# EAGLE board Escorna_Shield_botoneira_2_0B (EAGLE 6.4)
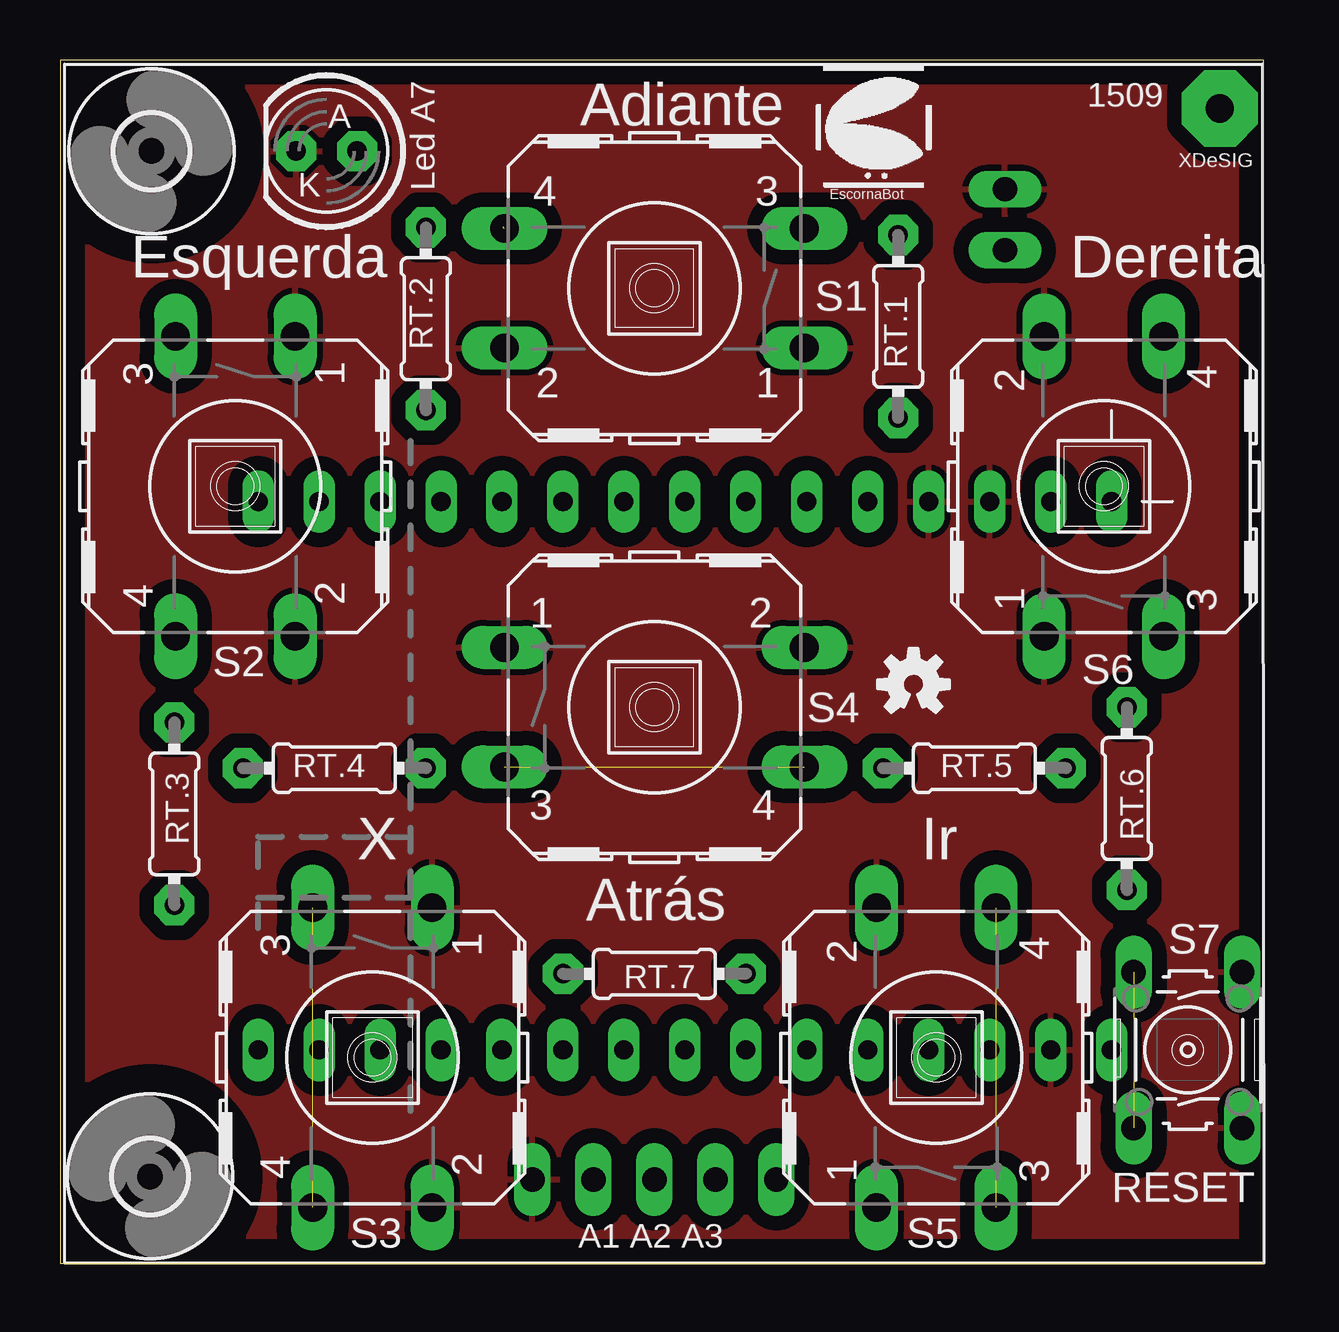
[diagram p0: board, top side]
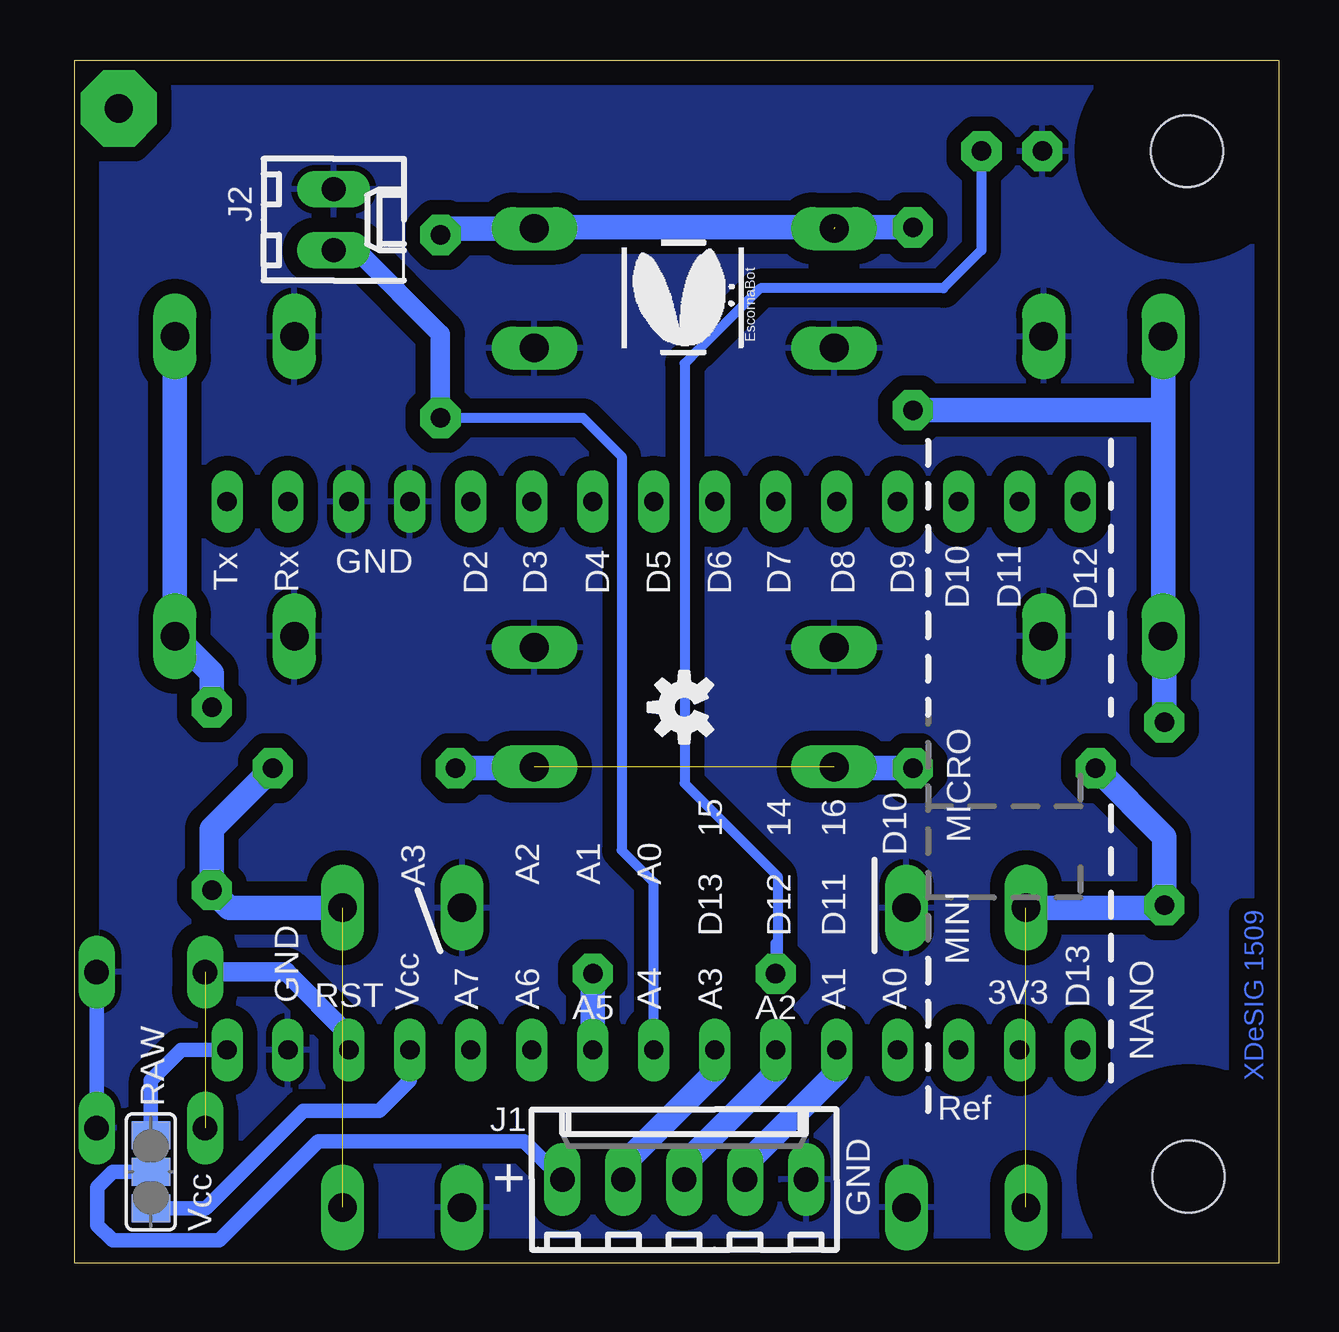
[diagram p1: board, bottom side, seen from below]

Size 50.15 x 50.16 mm. Coordinates in mm from the lower left corner, seen from the top.
Outline: 0,0 50.15,0 50.15,50.16 0,50.16 0,0
Copper layers (1*16): Top 0.035mm / dielectric 1.5mm / Bottom 0.035mm
Design rules "default": minimum track width 10mil, minimum drill 24mil, track to track 8mil, track to pad 8mil, pad to pad 8mil, via to via 8mil, smd to smd 8mil, copper to edge 40mil, drill to drill 8mil, minimum pad ring 10mil, minimum via ring 8mil, stop-mask expansion 4mil, vias tented up to drill 0mil, thermal gap 10mil

## Footprints (pad centres in the part's own frame; a part is rotated, then mirrored left to right if it is on the bottom)
LED5MM = drill 0.813 pad 1.676 octagon: A -1.27,0; K 1.27,0
OUTL_ESCORNASHIELD = drill 0.8 long: 3V3 -16.51,13.97; A0 -16.51,8.89; A1 -16.51,6.35; A2 -16.51,3.81; A3 -16.51,1.27; A4 -16.51,-1.27; A5 -16.51,-3.81; A6 -16.51,-6.35; A7 -16.51,-8.89; AREF -16.51,11.43; D2 6.35,-8.89; D3 6.35,-6.35; D4 6.35,-3.81; D5 6.35,-1.27; D6 6.35,1.27; D7 6.35,3.81; D8 6.35,6.35; D9 6.35,8.89; D10 6.35,11.43; D11 6.35,13.97; D12 6.35,16.51; D13 -16.51,16.51; GND 6.35,-13.97; GND1 6.35,-11.43; GND2 -16.51,-16.51; RAW -16.51,-19.05; RST -16.51,-13.97; RX 6.35,-16.51; TX 6.35,-19.05; VCC -16.51,-11.43 | drill 1.17 pad 3.17 octagon: P$1 22.733,-23.558 | hole 3: -21.78,21.018
3,0 = hole 3: 0,0
6410-05 = drill 1.016 long: 1 5.08,0; 2 2.54,0; 3 0,0; 4 -2.54,0; 5 -5.08,0
6410-02 = drill 1.016 long: 1 1.27,0; 2 -1.27,0
0204/7 = drill 0.813 pad 1.676 octagon: 1 -3.81,0; 2 3.81,0
B3F40XX_NH = drill 1.194 long: 1 -6.248,2.489; 2 6.248,2.489; 3 -6.248,-2.489; 4 6.248,-2.489
B3F-10XX = drill 1.016 long: 1 -3.251,2.261; 2 3.251,2.261; 3 -3.251,-2.261; 4 3.251,-2.261
SJ_2 = smd 1.168 x 1.6: 1 -1.524,0; 2 0,0; 3 1.524,0

## Placement (x,y rotation side)
D1  3 a 5mm  [LED5MM]  11.11,46.35 180 top
ESSH1  [OUTL_ESCORNASHIELD]  24.77,25.4 90 top
H1  MOUNT-HOLE3.0  [3,0]  3.81,46.35 0 top
J1  22-27-2051-05  [6410-05]  24.77,3.49 0 bottom
J2  22-27-2021-02  [6410-02]  39.37,43.5 270 bottom
LOGO1  OSHW-LOGOS  [OSHW-LOGO-S]  35.56,24.13 0 top
LOGO2  OSHW-LOGOS  [OSHW-LOGO-S]  24.77,23.18 90 bottom
RT.1  10K  [0204/7]  34.92,39.05 270 top
RT.2  10K  [0204/7]  15.24,39.37 90 top
RT.3  10K  [0204/7]  4.76,18.73 90 top
RT.4  10K  [0204/7]  11.43,20.64 180 top
RT.5  10K  [0204/7]  38.1,20.64 180 top
RT.6  10K  [0204/7]  44.45,19.37 270 top
RT.7  1K  [0204/7]  24.77,12.06 0 top
S1  B3F-40XX  [B3F40XX_NH]  24.77,40.64 180 top
S2  B3F-40XX  [B3F40XX_NH]  7.3,32.38 270 top
S3  B3F-40XX  [B3F40XX_NH]  13.02,8.57 270 top
S4  B3F-40XX  [B3F40XX_NH]  24.77,23.18 0 top
S5  B3F-40XX  [B3F40XX_NH]  36.51,8.57 90 top
S6  B3F-40XX  [B3F40XX_NH]  43.5,32.38 90 top
S7  [B3F-10XX]  46.99,8.89 270 top
SJ1  [SJ_2]  46.99,3.81 270 bottom
U$1  ESCORNABOT  [ESCORNA_PEQUE]  22.23,37.78 90 bottom
U$2  ESCORNABOT  [ESCORNA_PEQUE]  31.43,44.77 0 top

## Library data of the parts
D1 = adafruit
ESSH1 U$1 U$2 = escorna
H1 = holes
J1 J2 = con-molex; OC_FARNELL: unknown; OC_NEWARK: unknown
LOGO1 LOGO2 = SparkFun-Aesthetics
RT.1-RT.7 = rcl
S1-S6 = switch-omron
S7 = switch-omron; MPN: B3F-1000; OC_FARNELL: 176432; OC_NEWARK: 36M3542
SJ1 = SparkFunEagle-6-6-07

## Nets
A4: ESSH1.A4 J2.1 RT.1.2
GND: D1.K ESSH1.GND ESSH1.GND1 ESSH1.GND2 J1.1 J2.2 S1.1 S1.2 S2.1 S2.2 S3.1 S3.2 S4.1 S4.2 S5.1 S5.2 S6.1 S6.2 S7.1 S7.2
LED1: ESSH1.A1 J1.2
LED2: ESSH1.A2 J1.3
LED3: ESSH1.A3 J1.4
LED_PL: ESSH1.A5 RT.7.2
N$1: D1.A RT.7.1
N$2: J1.5 SJ1.2
N$6: RT.6.1 S6.3 S6.4
N$7: RT.1.1 RT.2.2 S1.3 S1.4
N$10: RT.2.1 RT.3.2 S2.3 S2.4
N$11: RT.3.1 RT.4.2 S3.3 S3.4
N$12: RT.4.1 RT.5.2 S4.3 S4.4
N$13: RT.5.1 RT.6.2 S5.3 S5.4
RAW: ESSH1.RAW SJ1.1
RST: ESSH1.RST S7.3 S7.4
VCC: ESSH1.VCC SJ1.3

## Tracks (layer width: path | path; a pad name or v marks a point on that pad's centre or on a via)
A4
  Bottom 0.406: ESSH1.A4 26.04,15.88 27.38,17.21 27.38,33.62 28.99,35.24 RT.1.2
  Bottom 0.813: RT.1.2 34.92,38.73 38.42,42.23 J2.1
GND
  Bottom 0.61: S7.1 S7.2
  pour Bottom (isolate 0.61): 0,50.8 50.8,50.8 50.8,0 0,0
  pour Top (isolate 0.61): 0,49.53 0,50.8 50.8,50.8 50.8,0 0,0
LED1
  Bottom 1.016: J1.2 22.23,4.13 18.41,7.94 ESSH1.A1
LED2
  Bottom 1.016: J1.3 24.77,4.13 20.95,7.94 ESSH1.A2
LED3
  Bottom 1.016: J1.4 27.3,4.13 23.5,7.94 ESSH1.A3
LED_PL
  Bottom 1.016: RT.7.2 ESSH1.A5
N$1
  Bottom 0.406: 20.95,13.34 RT.7.1 20.88,12.14 20.88,16.12 24.75,20 24.75,37.5 24.15,38.1 24.13,38.1 21.59,40.64 13.97,40.64 12.38,42.23 D1.A
N$2
  Bottom 0.61: SJ1.2 48.58,3.81 49.21,3.17 49.21,1.59 48.58,0.95 44.13,0.95 40.01,5.08 31.43,5.08 J1.5
N$6
  Bottom 1.016: S6.4 S6.3 44.45,24.6 RT.6.1
N$7  (1 unrouted)
  Bottom 1.016: RT.2.2 18.47,43.18 | S1.4 18.57,43.18 31.01,43.18 S1.3 34.66,43.13 RT.1.1
N$10
  Bottom 1.016: RT.3.2 4.76,26.09 S2.4 4.81,35.56 | S2.3 4.81,35.56 | RT.2.1 4.81,35.56
N$11  (1 unrouted)
  Bottom 1.016: RT.4.2 4.76,17.78 RT.3.1 4.86,14.82 S3.3
N$12  (1 unrouted)
  Bottom 1.016: RT.4.1 18.47,20.64 S4.3 | RT.5.2 31.06,20.64 S4.4
N$13  (1 unrouted)
  Bottom 1.016: S5.4 43.71,14.82 RT.6.2 44.45,18.1 RT.5.1
RAW
  Bottom 0.61: SJ1.1 46.99,7.62 45.72,8.89 ESSH1.RAW
RST  (1 unrouted)
  Bottom 0.813: S7.3 41.35,12.14 38.73,9.53 ESSH1.RST
VCC
  Bottom 0.61: SJ1.3 44.7,2.29 40.64,6.35 37.47,6.35 36.2,7.62 ESSH1.VCC

## Text on the board
Bottom: XDeSIG 1509
tPlace: Adiante | A | 1509 | K | Led A7 | Esquerda | Dereita | X | Ir | Atrás | RESET | A1 A2 A3
bPlace: D12 | D11 | D10 | D9 | D8 | D7 | D6 | D5 | D4 | D3 | D2 | GND | Rx | Tx | D10 | 16 | 14 | 15 | MICRO | A0 | A1 | A2 | A3 | D11 | D12 | D13 | GND | NANO | D13 | Vcc | 3V3 | MINI | A0 | A1 | A3 | A4 | A6 | A7 | RST | A2 | A5 | RAW | Ref | GND | + | Vcc
Document: Creative Commons Recoñecemento 4.0 Internacional (CC BY 4.0)